# EAGLE board panel - type II - standard - complete (EAGLE 6.1)
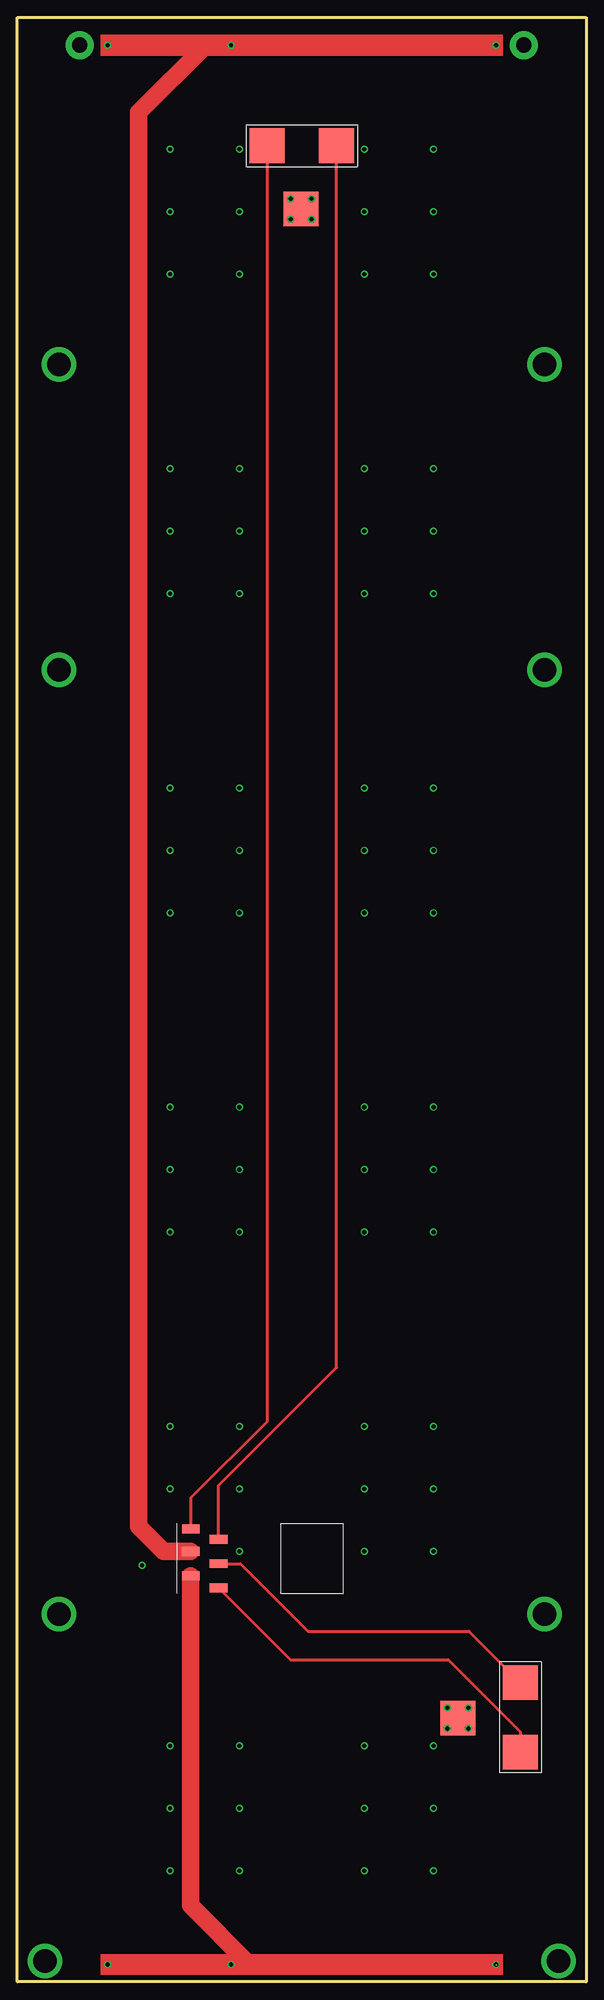
[diagram p0: board, top side]
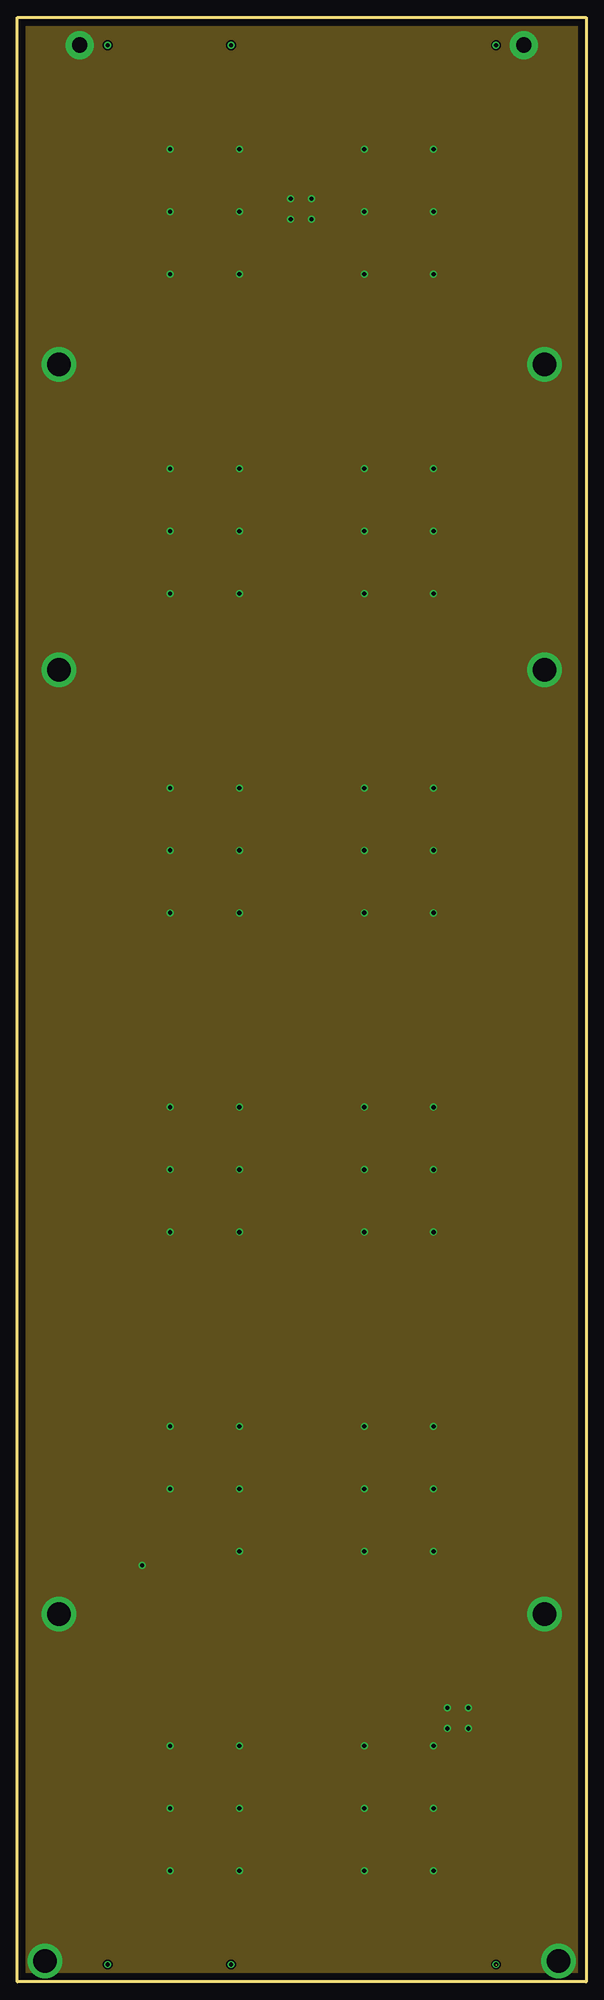
[diagram p1: board, inner layer Route2]
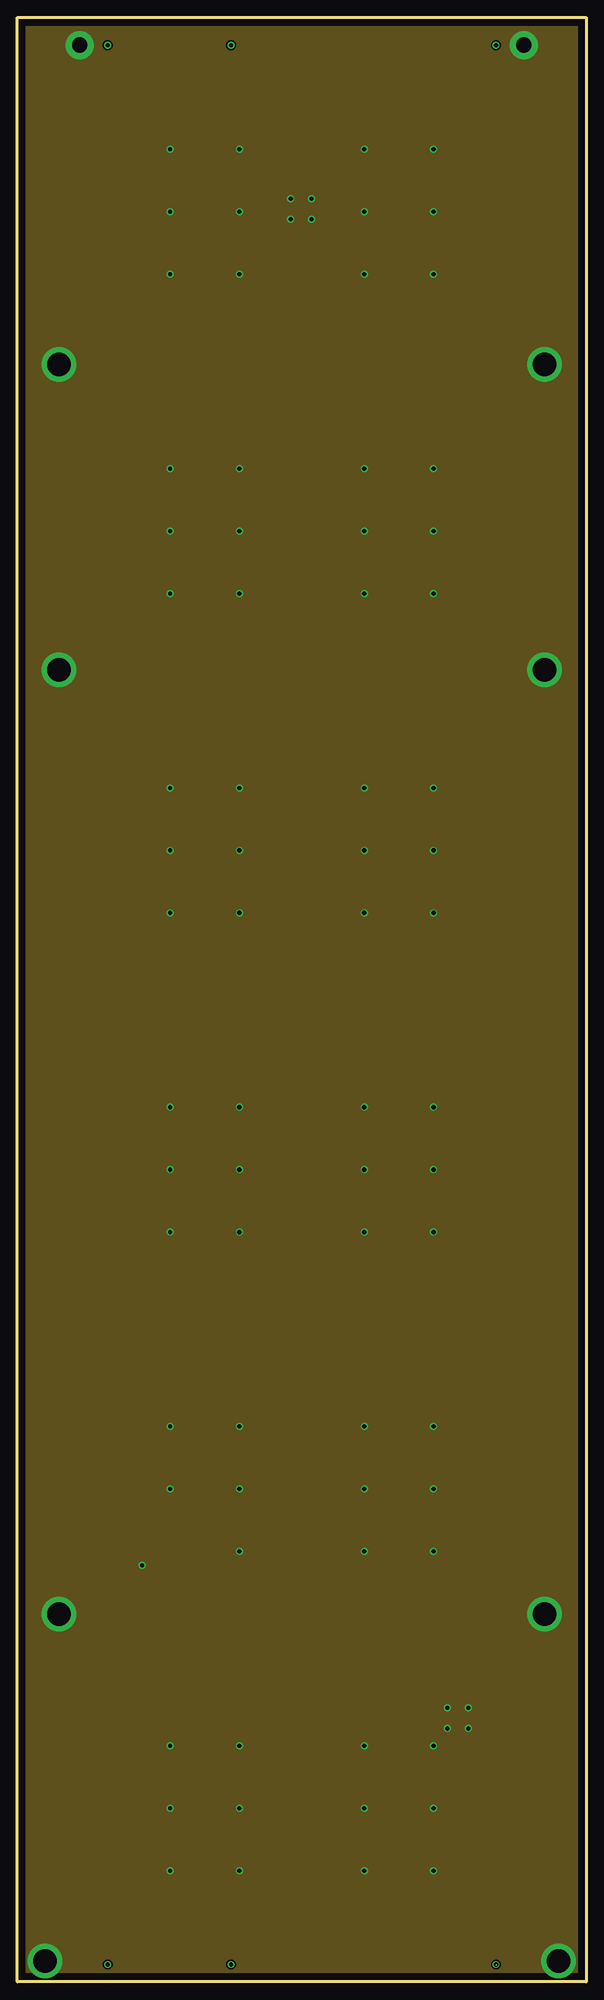
[diagram p2: board, inner layer Route15]
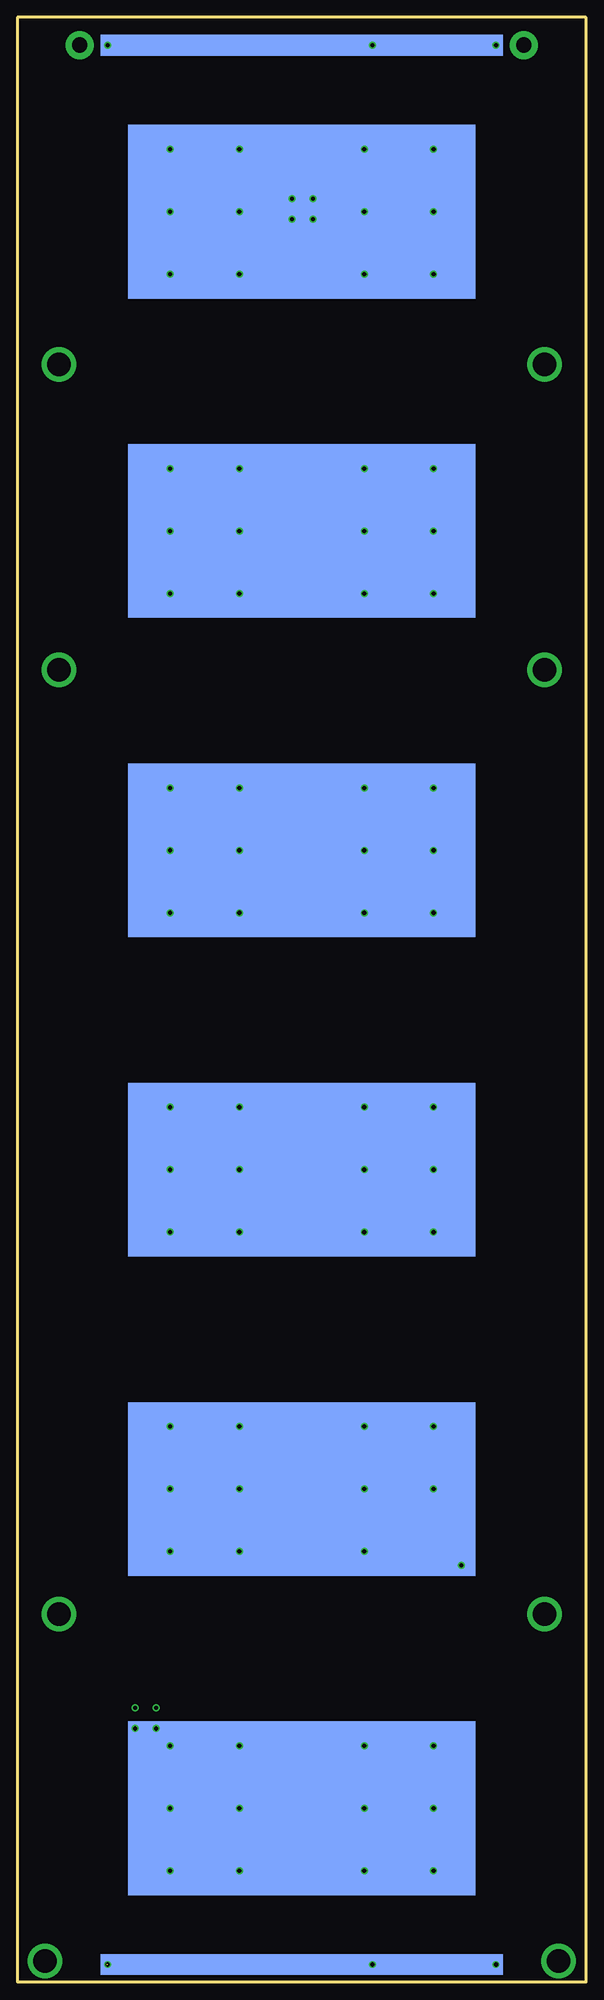
[diagram p3: board, bottom side, seen from below]

Size 82 x 283 mm. Coordinates in mm from the lower left corner, seen from the top.
Outline: 0,0 0,283 82,283 82,0 0,0
Copper layers (1*16): Top 0.035mm / dielectric 1.5mm / Bottom 0.035mm
Design rules: minimum track width 10mil, minimum drill 24mil, track to track 8mil, track to pad 8mil, pad to pad 8mil, via to via 8mil, smd to smd 8mil, copper to edge 40mil, drill to drill 8mil, minimum pad ring 10mil, minimum via ring 8mil, stop-mask expansion 4mil, vias tented up to drill 0mil, thermal gap 10mil

## Footprints (pad centres in the part's own frame; a part is rotated, then mirrored left to right if it is on the bottom)
GENERIC-2PORT = smd 5 x 5: P$1 5,0; P$2 -5,0
SMD_THRM_PAD = smd 5 x 5: P$1 0,0
M80-8120605-SM = smd 2.54 x 1.27: P$1 17.5,2.5; P$2 13.5,0.75; P$3 17.5,-1; P$4 13.5,-2.75; P$6 13.5,4.25; P$7 17.5,-4.25
SOLARPNL_CIC_PAD = smd 58 x 3: P$3 0,0
SOLARPNL_THRM_PAD = smd 50 x 25: P$1 0,0

## Placement (x,y rotation side)
E$1  [GENERIC-2PORT]  72.5,38.1 270 top
E$2  [GENERIC-2PORT]  41,264.5 0 top
E$3  [SMD_THRM_PAD]  40.9,255.4 0 top
E$4  [SMD_THRM_PAD]  63.5,38 0 top
E$5  [M80-8120605-SM]  42.5,61 180 top
E$6  [SOLARPNL_CIC_PAD]  41,279 0 bottom
E$7  [SOLARPNL_CIC_PAD]  41,2.5 0 bottom
E$8  [SOLARPNL_THRM_PAD]  41,25 180 bottom
E$9  [SOLARPNL_THRM_PAD]  41,71 180 bottom
E$10  [SOLARPNL_THRM_PAD]  41,117 180 bottom
E$11  [SOLARPNL_THRM_PAD]  41,163 180 bottom
E$12  [SOLARPNL_THRM_PAD]  41,209 180 bottom
E$13  [SOLARPNL_THRM_PAD]  41,255 180 bottom

## Library data of the parts
E$1-E$13 = space-concordia-power

## Nets
S$2: E$1.P$1 E$5.P$6
S$3: E$5.P$3 E$6.P$3
S$4: E$1.P$2 E$5.P$2
S$5: E$2.P$1 E$5.P$4
S$6: E$2.P$2 E$5.P$7
S$7: E$5.P$1 E$7.P$3

## Tracks (layer width: path | path; a pad name or v marks a point on that pad's centre or on a via)
S$2
  Top 0.406: E$5.P$6 39.35,46.4 62.1,46.4 72.5,36 E$1.P$1
S$3  (via drill 0.6)
  Top 0.406: 17.5,65.6 17.5,66
  Top 1.27: v69,279 27.2,279
  Top 2.54: 17.5,66 17.5,269.3 27.2,279 | E$5.P$3 21.1,62 17.5,65.6
  Bottom 1.27: v13,279 v30.8,279 E$6.P$3 v69,279
S$4
  Top 0.406: E$5.P$2 32.15,60.25 41.9,50.5 65.1,50.5 E$1.P$2
S$5
  Top 0.406: E$5.P$4 29,71.5 46,88.5 E$2.P$1
S$6
  Top 0.406: E$5.P$7 25,69.7 36,80.7 E$2.P$2
S$7  (via drill 0.6)  (1 unrouted)
  Top 0.406: 33.5,2.5 69.1,2.5
  Top 2.54: E$5.P$1 25,11 33.5,2.5
  Bottom 1.27: v13,2.5 v30.8,2.5 E$7.P$3 v69,2.5
THERMAL1  (via drill 0.6, 2.2 pad 4, 3.4 pad 5)
  other vias: 4,3 78,3 76,53 6,53 6,189 76,189 76,233 6,233 9,279 73,279 62,36.5 62,39.5 65,39.5 65,36.5 39.4,256.9 42.4,256.9 42.4,253.9 39.4,253.9 22,16 32,16 32,25 22,25 22,34 32,34 50,34 60,34 60,16 50,16 50,25 60,25 18,60 22,71 22,80 22,108 22,117 22,126 22,154 22,163 22,172 22,200 22,209 22,218 22,246 22,255 22,264 32,62 50,62 60,62 32,71 50,71 60,71 60,80 50,80 32,80 32,108 50,108 60,108 32,117 50,117 60,117 60,126 50,126 32,126 32,154 32,163 32,172 50,172 60,172 50,163 60,163 50,154 60,154 32,200 50,200 60,200 60,209 50,209 32,209 32,218 50,218 60,218 32,246 32,255 32,264 50,264 50,255 50,246 60,246 60,255 60,264
  pour Route2: -0.4,283.3 82.3,283.3 82.3,-0.2 -0.4,-0.2
  pour Route15: -0.3,-0.3 82.3,-0.3 82.3,283.3 -0.3,283.3
(copper drawn outside any net)
  shapes: Top area x2